# Altium PCB otis_v4.PcbDoc
Units mil, origin at the board's own origin, x right, y up, seen from the top; angles counter-clockwise.
Board outline 2020 x 950 mil, 2 copper layers (Top Layer, Bottom Layer); 14 components, 18 nets, 92 pads, 15 vias.
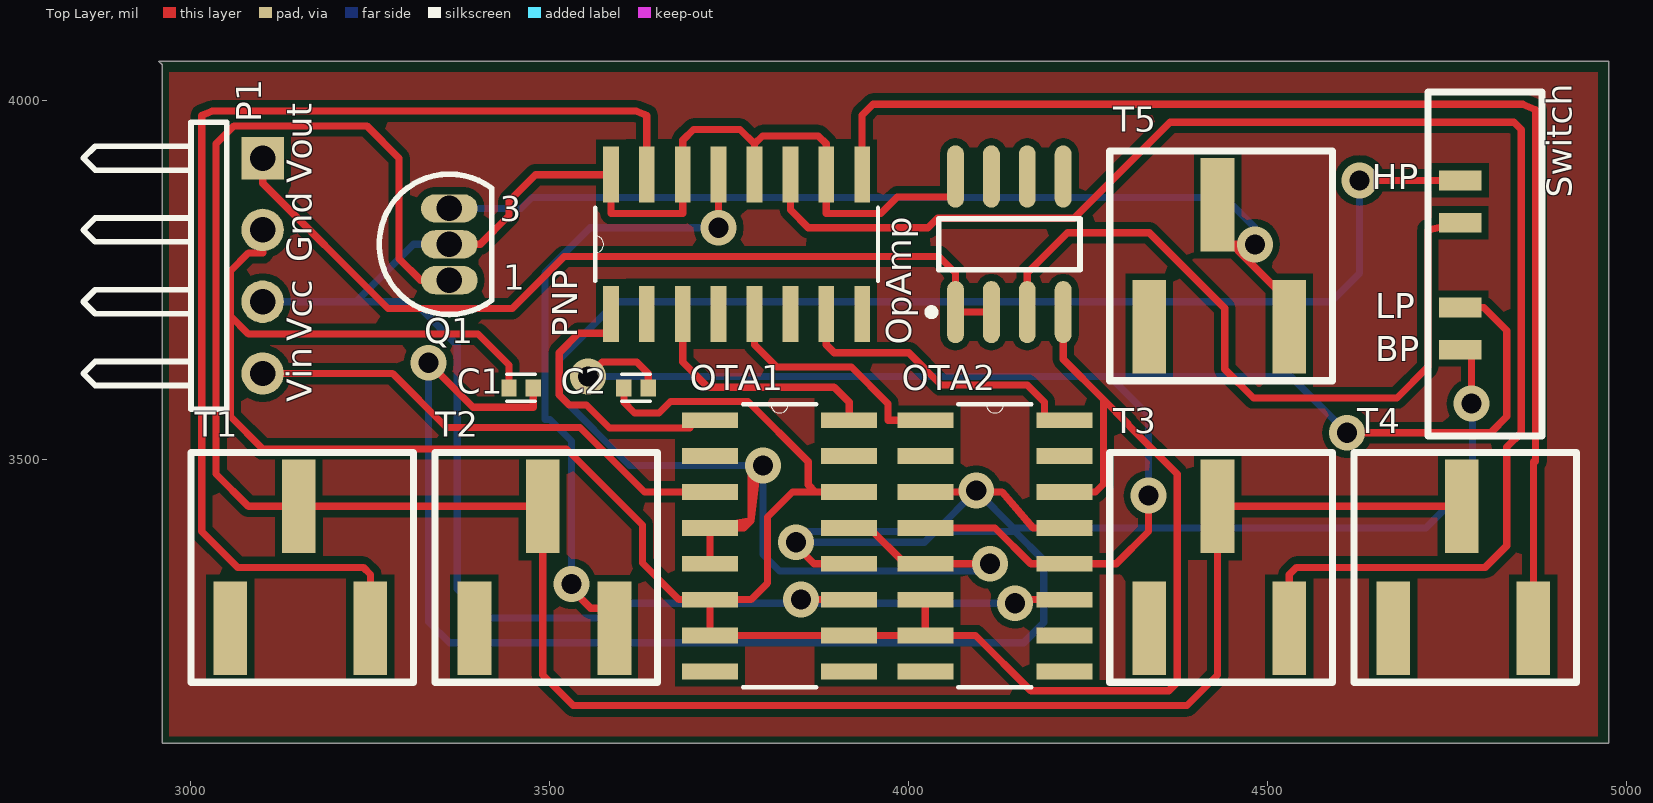
[diagram p0: Top Layer view]
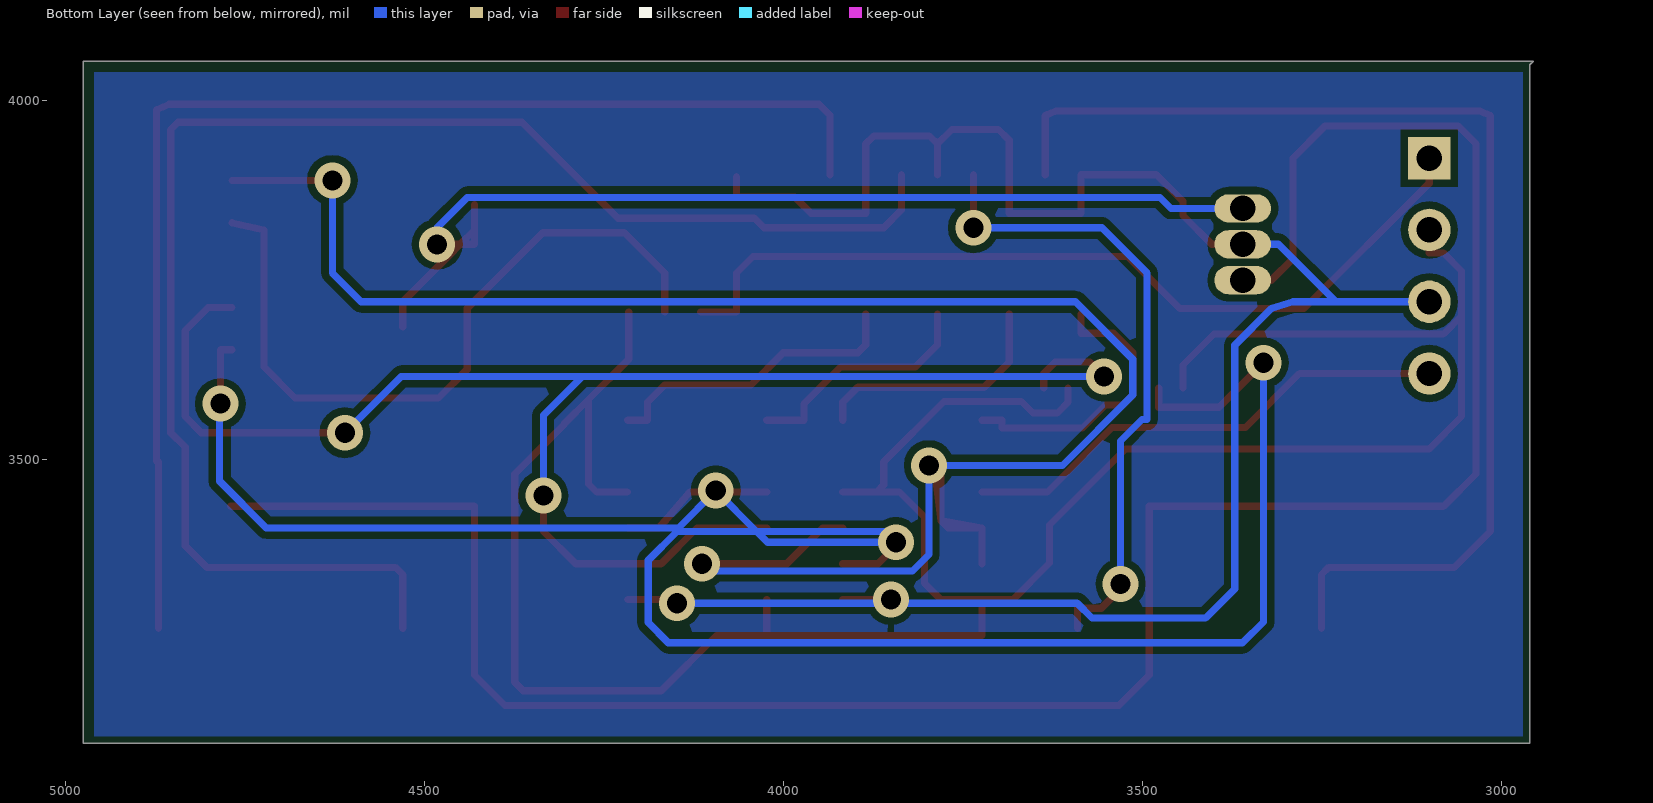
[diagram p1: Bottom Layer view, seen from below]

## Layer stack, top to bottom
Top Layer: signal copper 1.4
Dielectric: dielectric 12.6, FR-4, Dk 4.8
Bottom Layer: signal copper 1.4

## Board outline
2955,4055 4975,4055 4975,3105 2960,3105 2960,4050

## Design rules (kind name [scope] priority, off if disabled: settings)
Clearance [All] p1: gap=10
ComponentClearance [All] p1: gap=10 collisioncheckmode=3 verticalgap=10
PolygonConnect [All] p1: connectstyle=Relief reliefconductorwidth=10 reliefentries=4 polygonreliefangle="90 Angle"
RoutingVias [All] p1: holewidth=28 width=50 viastyle="Through Hole" minholewidth=28 minwidth=50 maxholewidth=28 maxwidth=50
SolderMaskExpansion [All] p1: expansion=4
TestPointUsage [All] p1: valid=0 allowmultiple=FALSE
Testpoint [All] p1: side=15 testpointundercomponent=TRUE minsize=40 maxsize=100 preferedsize=60 minholesize=0 maxholesize=40 preferedholesize=32 testpointgrid=1 style=1023 order=0-112345678
Width [All] p1: maxlimit=10 minlimit=10 preferedwidth=10
18 further rules are at their usual default settings.

## Components (designator, comment, footprint, x,y, rotation, side; value= is the part's Value field where it differs from the comment)
C1 "2pF" _C*CAPC1005X55N_CC0402C100K5GACAUTO_CPrimary_C 3460,3600 r0 top
C2 "2pF" _C*CAPC1005X55N_CC0402C100K5GACAUTO_CPrimary_C 3620,3600 r0 top
OpAmp "LF153D" SO8_N 4140,3800 r90 top
OTA1 "LM13700M" LM13700LM13700MLM13700LM13700MLM13700PrimaryLM13700 3820,3380 r0 top
OTA2 "LM13700M" LM13700LM13700MLM13700LM13700MLM13700PrimaryLM13700 4120,3380 r0 top
P1 "Header 4H" HDR1X4H 3100,3920 r270 top
PNP "MMPQ3906" LM13700LM13700MLM13700LM13700MLM13700PrimaryLM13700 3760,3800 r90 top
Q1 "2N3906" TO-92A 3360,3800 r0 top
T1 "" PCBComponent_1#1 17520,31340 r0 top
T2 "" PCBComponent_1#1 17860,31340 r0 top
T3 "" PCBComponent_1#1 18800,31340 r0 top
T4 "" PCBComponent_1#1 19140,31340 r0 top
T5 "\" PCBComponent_1#1 18800,31760 r0 top
? "Switch" PCBComponent_1#2 -28240,30600 r90 top

## Footprints (in the part's own frame and the unit in brackets; to place one, negate y for a bottom-side part, rotate by r counter-clockwise, add the part's x,y. Pads: shape width x height; smd on the part's side, far side on the other; paste and mask are expansions set on the pad)
_C*CAPC1005X55N_CC0402C100K5GACAUTO_CPrimary_C [mm]
  rect 0.54x0.6 smd: 1(-0.43,0) 2(0.43,0)
  silkscreen extent -0.5,-0.48 0.5,0.48
HDR1X4H [mm] "Connector; Header; 4 Position; Right Angle"
  rect 1.5x1.5 hole 0.9: 1(0,0)
  round 1.5 hole 0.9: 2(2.54,0) 3(5.08,0) 4(7.62,0)
  silkscreen extent -1.27,-6.35 8.89,-1.27
LM13700LM13700MLM13700LM13700MLM13700PrimaryLM13700 [mil]
  rect 78x22 smd: 1(-97,175) 2(-97,125) 3(-97,75) 4(-97,25) 5(-97,-25) 6(-97,-75) 7(-97,-125) 8(-97,-175) 9(97,-175) 10(97,-125) 11(97,-75) 12(97,-25) 13(97,25) 14(97,75) 15(97,125) 16(97,175)
  silkscreen extent -51,-197 51,197
PCBComponent_1#1 [mm]
  rect 1.19x3.3 smd: 1(-364.998,-708.787) 2(-367.411,-713.105) 3(-362.458,-713.105)
  silkscreen extent -368.81,-715.01 -360.93,-706.88
PCBComponent_1#2 [mm]
  rect 0.7x1.5 smd: 1(-684.454,-838.403) 2(-682.955,-838.403) 3(-679.958,-838.403) 4(-678.459,-838.403)
  round 0.9 on Top Solder: 8(-683.971,-840.054) 9(-678.942,-840.054)
  rect 1x0.8 on Top Paste: MP1(-686.587,-839.089) MP2(-686.587,-840.537) MP3(-676.25,-839.089) MP4(-676.25,-840.537)
  silkscreen extent -687.5,-841.3 -675.34,-837.26
SO8_N [mm] "SOIC, 8-Leads, Body 4.9x3.9mm, Pitch 1.27mm, IPC Medium Density"
  oval 2.2x0.6 smd: 1(-2.4,1.905) 2(-2.4,0.635) 3(-2.4,-0.635) 4(-2.4,-1.905) 5(2.4,-1.905) 6(2.4,-0.635) 7(2.4,0.635) 8(2.4,1.905)
  silkscreen extent -2.52,-2.5 0.9,2.88, body extent -1.95,-2.45 1.95,2.45, height 1.75
TO-92A [mm] "TO, Flat Index; 3 In-Line, Axial Leads; Body Dia. 4.5mm; Leads 0.51 x 0.48 mm (max)"
  oval 2x1 hole 0.9: 1(0,-1.27) 2(0,0) 3(0,1.27)
  silkscreen extent -2.48,-2.48 1.5,2.48

## Part data
C1 C2: library part C0402C100K5GACAUTO, "CAPACITOR CERAMIC 10 PF 10% TOL 50V C0G 0402"
OpAmp: "Wide-Bandwidth Dual J-FET Operational Amplifier"
OTA1 OTA2: "Dual Operational Transconductance Amplifier with Linearizing Diodes and Buffers 16-SOIC 0 to 70"
P1: "Header, 4-Pin, Right Angle"
PNP: library part LM13700M, "Dual Operational Transconductance Amplifier with Linearizing Diodes and Buffers 16-SOIC 0 to 70"
Q1: "PNP General Purpose Amplifier"
T1 T2 T3 T4 T5 ?: library part Component_1

## Via types
v1: diameter 50, hole 28, Top Layer to Bottom Layer, 15 vias

## Nets (pads, with @x,y where several pads share a name; then routed paths per layer and width w, separated by ;. In a path a pad name is that pad's centre, name@x,y a point inside that pad or via, vN(x,y) a via of type N, cw(c..) or ccw(c..) an arc to the next point about the centre after c; other vN are vias at no path point)
BP: ?.1 C1.2 OTA1.12 OTA2.3 OTA2.13 | length 3424.4
  Top Layer w10: v1(3331,3635) 3393,3573 3476.93,3573 C1.2 ; v1(3843,3385) 3843,3380 3868,3355 OTA1.12 ; OTA2.3 v1@4092,3455 ; v1(4094,3457) v1@4092,3455 ; OTA2.13 4173,3405 4130,3455 4094,3455 v1@4092,3455 ; ?.1 4784,3653 v1(4784,3578)
  Bottom Layer w10: v1(3331,3635) 3331,3274 3360,3245 4160,3245 4188,3273 4188,3360 4148,3400 4037,3400 ; v1(4784,3578) 4785,3578 4785,3470 4720,3405 4146,3405 v1(4094,3457) 4037,3400 ; 4037,3400 4022,3385 v1(3843,3385) 3858,3400 4037,3400
GND: C1.1 C2.1 OpAmp.4 OTA1.6 OTA1.7 OTA1.10 OTA1.14 OTA2.6 OTA2.7 OTA2.14 P1.2 | length 3769.8
  Top Layer w10: P1.2 3100,3788 3080,3788 3055,3763 3055,3700 ; C1.1 3443.07,3631.93 3400,3675 3080,3675 3055,3700 ; C2.1 3603.07,3580 3618.07,3565 3652,3565 3668,3581 3776,3581 3860,3497 3860,3465 3870,3455 ; OTA1.14 3870,3455 ; OTA2.6 OTA2.7 ; OpAmp.4 4215,3640 4271,3584 ; OTA2.14 4260,3455 4271,3466 4271,3584 ; 3055,3700 3055,3560 3100,3515 3523.07,3515 3629,3409.07 3629,3356 3680,3305 OTA1.6 ; OTA1.6 OTA1.7 OTA1.10 OTA2.7 ; OTA1.6 3780,3305 3803,3328 3803,3420 3838,3455 3870,3455 ; OTA2.7 4093,3255 4170,3178 4362,3178 4374,3190 4374,3480 4305,3549 4305,3550 4271,3584
HP: ?.4 OTA1.4 OTA1.5 OTA1.13 OTA2.5 | length 2819.3
  Top Layer w10: OTA1.5 OTA1.4 ; v1(3797,3492) v1@3790,3492 ; OTA1.13 3945,3405 3995,3355 OTA2.5 v1(4113,3355) ; v1(4628,3889) ?.4 ; OTA1.4 3770,3405 3780,3415 ; OTA1.4 3780,3415 ; 3780,3415 3780,3482 v1@3790,3492 ; 3780,3415 v1@3790,3492
  Bottom Layer w10: v1(4113,3355) 4113,3345 3820,3345 3797,3368 v1(3797,3492) 3611,3492 3513,3590 3513,3640 3593,3720 4588,3720 4628,3760 v1(4628,3889)
LP: ?.2 C2.2 OTA2.4 OTA2.12 | length 2227.6
  Top Layer w10: v1(3553,3616) 3573,3636 3620.93,3636 3636.93,3620 C2.2 ; OTA2.4 4120,3405 4170,3355 OTA2.12 4289,3355 4334,3400 v1(4334,3450) ; v1(4610.47,3537.53) 4810.53,3537.53 4833,3560 4833,3680 4801,3712 ?.2
  Bottom Layer w10: v1(3553,3616) 4280,3616 ; v1(4334,3450) 4334,3562 4280,3616 ; v1(4610.47,3537.53) 4532,3616 4280,3616
Net_3: ?.3 OpAmp.3 | length 1035.8
  Top Layer w10: OpAmp.3 4165,3760 4221.18,3816.18 4334.82,3816.18 4440,3711 4440,3626 4480,3586 4680,3586 4723,3629 4723,3820 ?.3
NetOpAmp_1: OpAmp.1 OpAmp.2 P1.1 | length 1216.3
  Top Layer w10: P1.1 3100,3885 3274.48,3710.52 3447.52,3710.52 3520,3783 4042,3783 4065,3760 OpAmp.1 OpAmp.2
NetOTA1_1: OTA1.1 PNP.1 | length 409.2
  Top Layer w10: PNP.1 3585,3676 3540,3676 3513,3649 3513,3590 3527,3576 3551,3576 3583,3544 3695,3544 3695,3555 OTA1.1
NetOTA1_16: OTA1.16 PNP.3 | length 347.2
  Top Layer w10: PNP.3 3685,3636 3720,3601 3896,3601 3917,3580 OTA1.16
NetOTA2_1: OTA2.1 PNP.5 | length 338
  Top Layer w10: PNP.5 3785,3660 3816,3629 3920,3629 3971,3578 3971,3555 OTA2.1
NetOTA2_16: OTA2.16 PNP.7 | length 433.1
  Top Layer w10: PNP.7 3885,3660 3896,3649 4000,3649 4045,3604 4165,3604 4189,3580 4189,3555 OTA2.16
NetPNP_9: PNP.9 T4.3 | length 1754.3
  Top Layer w10: PNP.9 3935,3980 3950,3995 4855.07,3995 4873,3987.57 4873,3497.53 4870,3497.53 T4.3
NetPNP_11: PNP.11 T3.3 | length 2125.2
  Top Layer w10: PNP.11 3835,3848 3860,3823 4026.82,3823 4040,3836.18 4230,3836.18 4363.82,3970 4843,3970 4853,3960 4853,3537.53 4833,3517.53 4833,3380 4803,3350 4540,3350 4530,3340 T3.3
NetPNP_13: PNP.13 T2.3 | length 900.7
  Top Layer w10: v1(3530,3327) 3530,3320 3557,3293 3590,3293 T2.3 ; v1(3735,3823) PNP.13
  Bottom Layer w10: v1(3530,3327) 3530,3526 3500,3556 3493,3556 3493,3760 3556,3823 v1(3735,3823)
NetPNP_15: PNP.15 T1.3 | length 1619.1
  Top Layer w10: T1.3 3250,3340 3240,3350 3065,3350 3015,3400 3015,3979.45 3029.53,3985.47 3620.47,3985.47 3635,3979.45 PNP.15
NetQ1_1: Q1.1 T1.1 T2.1 T3.1 T4.1 | length 3225.4
  Top Layer w10: Q1.1 3320,3750 3290,3780 3290,3920 3245,3965 3060,3965 3035,3940 3035,3480 3080,3435 T2.1 3490,3200 3532.62,3157.38 4387.38,3157.38 4430,3200 T3.1 T4.1
NetQ1_3: Q1.3 T5.1 T5.3 | length 1452.4
  Top Layer w10: T5.1 T5.1@4430,3820 ; v1(4482,3800) T5.1@4450,3800 ; T5.3 4530,3720 4466,3784 T5.1@4450,3800 ; T5.1@4430,3820 4430,3800 T5.1@4450,3800 ; T5.1@4430,3820 T5.1@4450,3800
  Bottom Layer w10: Q1.3 3459.85,3850 3475.1,3865.25 4440,3865.25 4482,3823.25 v1(4482,3800)
VCC: OpAmp.8 OTA1.11 OTA2.11 P1.3 PNP.10 PNP.12 PNP.14 PNP.16 Q1.2 | length 2858.2
  Top Layer w10: Q1.2 3403,3800 3443,3840 3443,3860 3480,3897 PNP.16 3585,3843 3685,3843 3685,3945 3700,3960 3765,3960 3785,3940 ; PNP.12 3785,3940 ; v1(3850,3305) OTA1.11 ; OpAmp.8 4065,3866 3984,3866 3961,3843 3885,3843 3885,3940 3874,3951 3796,3951 3785,3940 ; v1(4148,3300) 4153,3305 OTA2.11
  Bottom Layer w10: P1.3 3290,3720 3320,3710.52 3371,3659.52 3371,3320 3411.52,3279.48 3570,3279.48 3590.52,3300 v1(4148,3300) ; 3230,3720 3310,3800 Q1.2 ; v1@3845,3300 v1(3850,3305)
VIN: OTA1.3 P1.4 | length 691.3
  Top Layer w10: P1.4 3281,3620 3356,3545 3541.79,3545 3631.79,3455 OTA1.3
pads on no net: ?.8 ?.9 ?.MP1 ?.MP2 ?.MP3 ?.MP4 OpAmp.5 OpAmp.6 OpAmp.7 OTA1.2 OTA1.8 OTA1.9 OTA1.15 OTA2.2 OTA2.8 OTA2.9 OTA2.10 OTA2.15 PNP.2 PNP.4 PNP.6 PNP.8 T1.2 T2.2 T3.2 T4.2 T5.2

## Polygon pours and split planes (outlines as drawn)
no net on Top Layer "gnd" (solid): 2970,4040 4960,4040 4960,3115 2970,3115
no net on Bottom Layer "gnd" (solid): 2970,4040 4960,4040 4960,3115 2970,3115

## Silkscreen, mask and mechanical layers (free items; w line width, h text height)
Top Overlay:
  text "Vout" at 3180,3885 h60 r90
  text "HP" at 4645,3865 h60
  text "Switch" at 4935,3865 h60 r90
  text "Gnd" at 3180,3775 h60 r90
  text "LP" at 4650,3685 h60
  text "Vcc" at 3180,3665 h60 r90
  text "BP" at 4650,3625 h60
  text "Vin" at 3180,3580 h60 r90

## Text inside footprints (layer, text, board x,y; h text height)
Q1: Top Overlay "3" at 3430,3820 h59.05; Top Overlay "1" at 3435,3725 h59.05